# Altium PCB FIT_PM_Dual_Range_AFE.PcbDoc (part 2 of 17)
Units mm, origin at the board's own origin, x right, y up, seen from the top; angles counter-clockwise.
Board outline 259 x 114 mm, 8 copper layers (Top Layer, Mid-Layer 1, Mid-Layer 2, Layer 1, Layer 2, Mid-Layer 3, Mid-Layer 4, Bottom Layer), stack 1.616 mm thick; 963 components, 806 nets, 4757 pads, 2208 vias.
Unrouted connection lines stored in the file: 682.
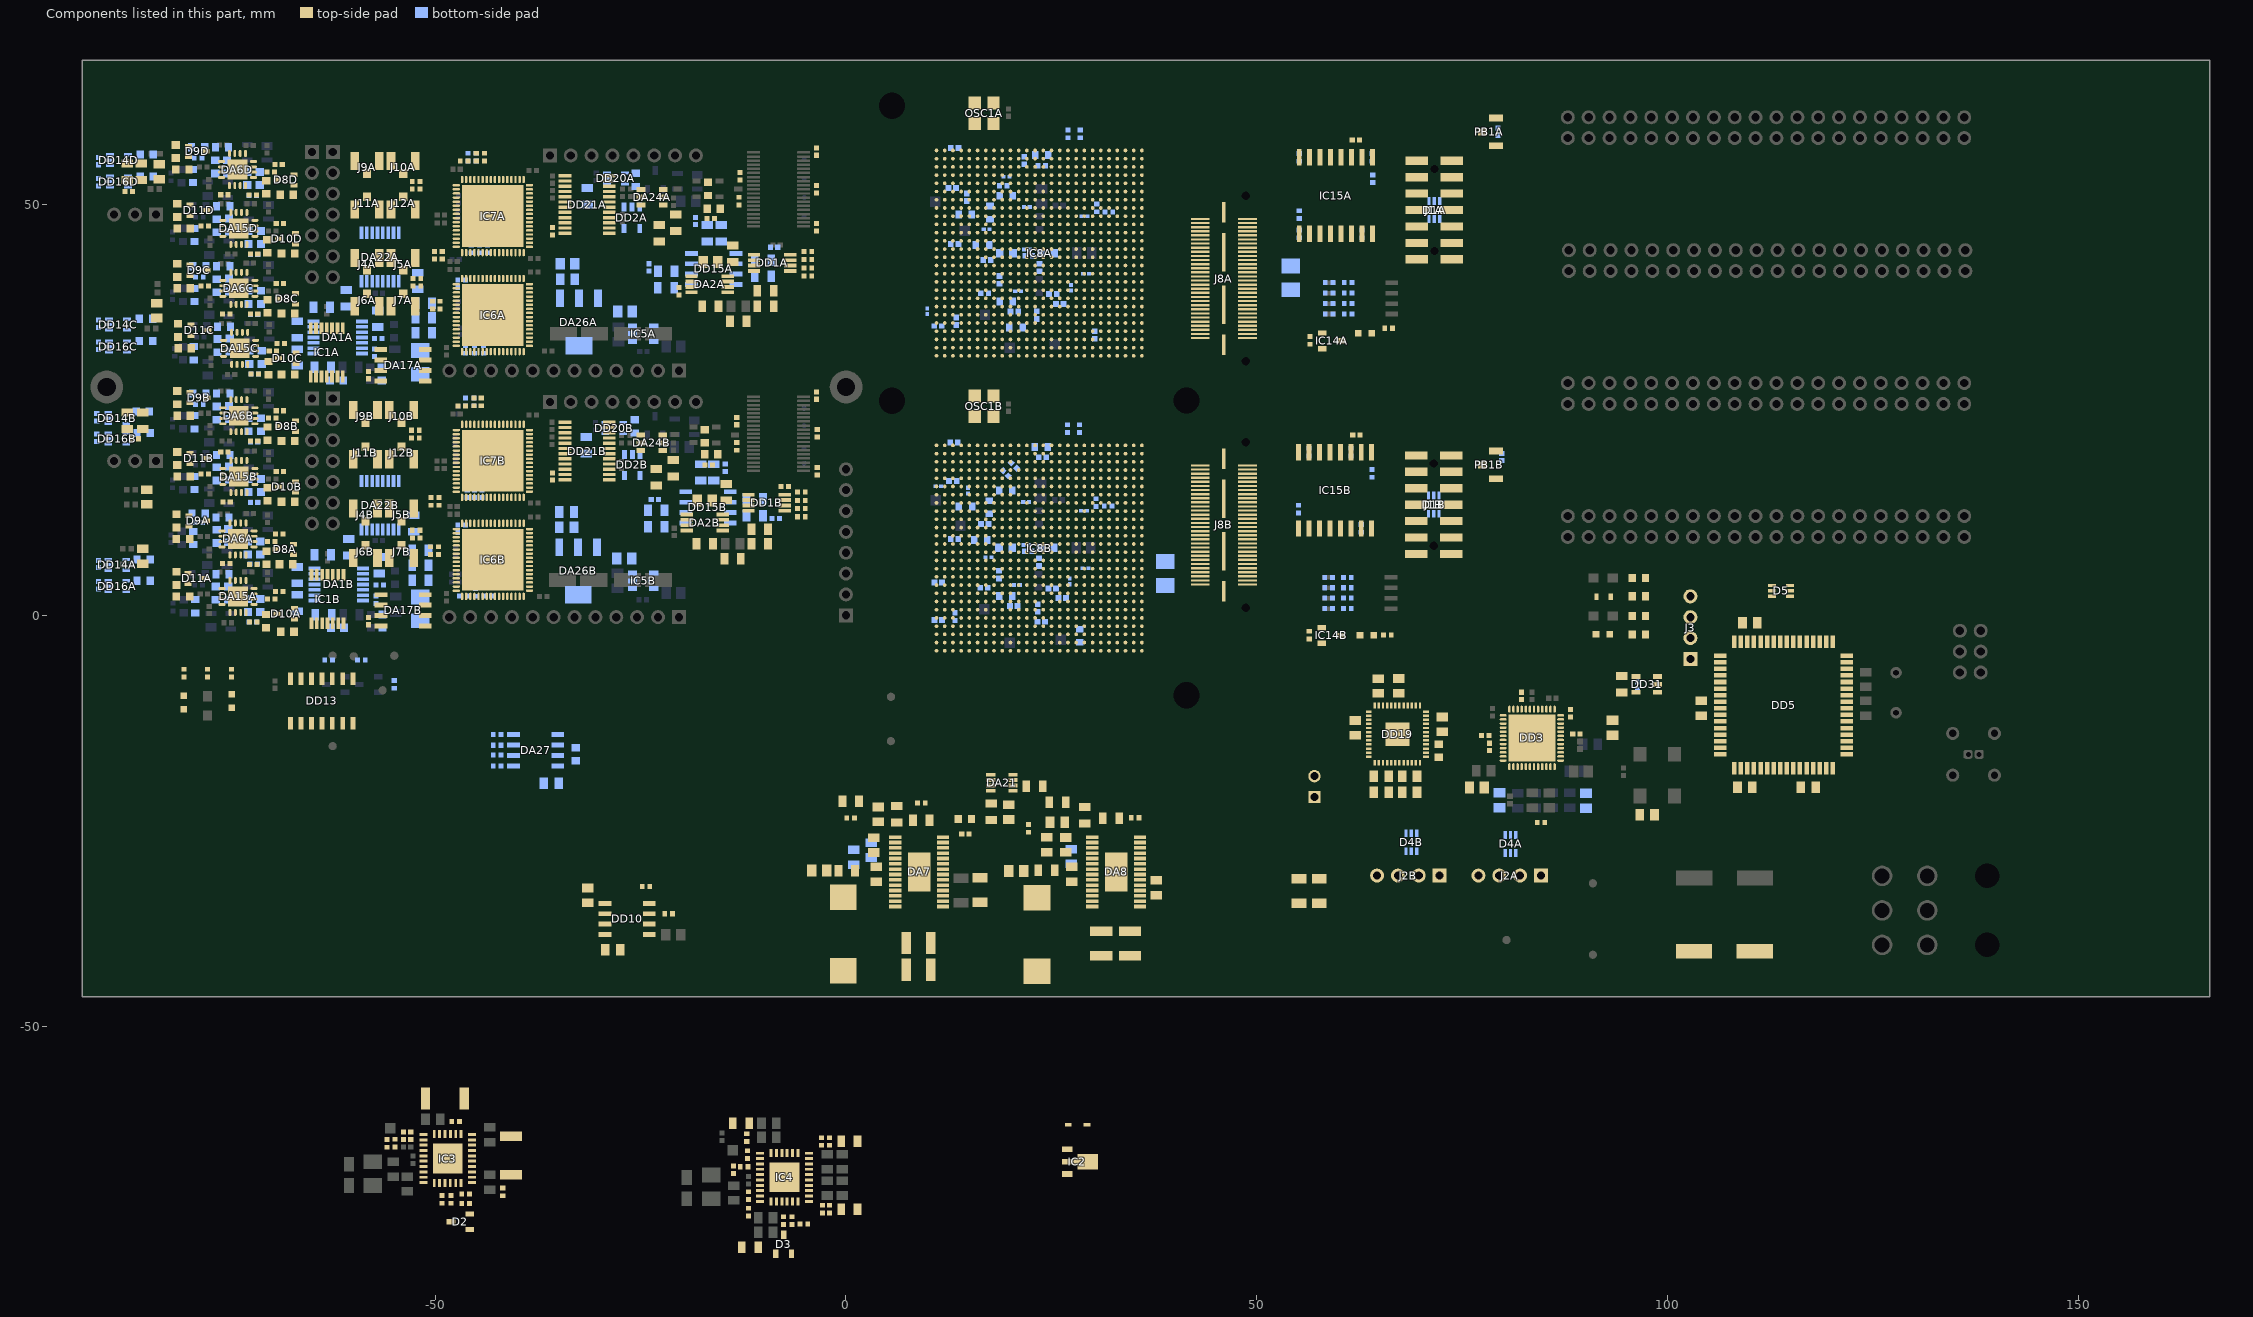
[diagram p6: the components of this part, seen from the top]

## Components (designator, comment, footprint, x,y, rotation, side; value= is the part's Value field where it differs from the comment) (continued)
C96A "220nF" CAPC1005X55N -16.45,48.3 r180 top (schematic designator C96)
C96B "220nF" CAPC1005X55N -16.7,18.3 r180 top (schematic designator C96)
C97A "220nF" CAPC1005X55N -12.9,53.45 r270 top (schematic designator C97)
C97B "220nF" CAPC1005X55N -3.5,17.55 r270 top (schematic designator C97)
C98A "470nF" CAPC0603X33N 17.12,46.997 r0 bottom (schematic designator C98)
C98B "470nF" CAPC0603X33N 11.253,15.717 r0 bottom (schematic designator C98)
C99A "220nF" CAPC1005X55N 62.075,57.856 r0 top (schematic designator C99)
C99B "220nF" CAPC1005X55N 62.133,21.967 r0 top (schematic designator C99)
C100A "220nF" CAPC1005X55N -20.3,39.45 r90 top (schematic designator C100)
C100B "220nF" CAPC1005X55N -7.45,15.7 r180 top (schematic designator C100)
C101A "220nF" CAPC1005X55N -24,42.35 r90 bottom (schematic designator C101)
C101B "220nF" CAPC1005X55N -23.25,14.1 r180 bottom (schematic designator C101)
C102A "220nF" CAPC1005X55N -75.45,6.3 r0 top (schematic designator C102)
C102B "220nF" CAPC1005X55N -75.4,13.8 r0 top (schematic designator C102)
C102C "220nF" CAPC1005X55N -75.45,36.7 r0 top (schematic designator C102)
C102D "220nF" CAPC1005X55N -75.65,51.2 r0 top (schematic designator C102)
C103A "47uF" CAPMP3528X120N -51.8,30.8 r270 bottom (schematic designator C103)
C103B "47uF" CAPMP3528X120N -51.8,0.8 r270 bottom (schematic designator C103)
C104A "220nF" CAPC1005X55N 79.369,58.836 r270 bottom (schematic designator C104)
C104B "220nF" CAPC1005X55N 79.827,19.273 r270 bottom (schematic designator C104)
C105 "220nF" CAPC1005X55N 88.915,-14.43 r180 top
C106 "220nF" CAPC1005X55N 78.319,-16.014 r270 top
C107 "220nF" CAPC1005X55N 96.349,-8.549 r270 bottom
C108 "220nF" CAPC1005X55N 88.17,-11.904 r270 top
C109 "220nF" CAPC1005X55N 82.219,-9.814 r270 top
C110A "220nF" CAPC1005X55N -3.6,47.25 r270 top (schematic designator C110)
C110B "220nF" CAPC1005X55N -3.5,22.15 r270 top (schematic designator C110)
C111A "220nF" CAPC1005X55N -3.6,56.45 r90 top (schematic designator C111)
C111B "220nF" CAPC1005X55N -3.6,26.75 r90 top (schematic designator C111)
C112A "220nF" CAPC1005X55N -3.6,51.85 r270 top (schematic designator C112)
C112B "220nF" CAPC1005X55N -13.3,23.65 r270 top (schematic designator C112)
C113A "220nF" CAPC1005X55N -8.75,44.8 r180 bottom (schematic designator C113)
C113B "220nF" CAPC1005X55N -8.55,11.8 r180 bottom (schematic designator C113)
C114 "47uF" CAPC3225X270N 8.813,-39.864 r180 top
C115 "47uF" CAPC3225X270N 8.813,-43.146 r180 top
C116A "220nF" CAPC1005X55N -35.7,46.75 r90 top (schematic designator C116)
C116B "220nF" CAPC1005X55N -35.7,16.9 r90 top (schematic designator C116)
C117A "220nF" CAPC1005X55N -18.3,48 r270 bottom (schematic designator C117)
C117B "220nF" CAPC1005X55N -14.7,17.95 r90 bottom (schematic designator C117)
C118 "22uF" CAPC3216X180N 16.314,-33.445 r90 top
C122 "220nF" CAPC2012X135N 3.102,-28.57 r270 bottom
C123 "220nF" CAPC2012X135N 3.656,-31.51 r270 top
C124 "360pF" CAPC2013X145N -3.244,-31.055 r0 top
C125A "220nF" CAPC1005X55N -91,6.25 r270 bottom (schematic designator C125)
C125B "220nF" CAPC1005X55N -91.2,24.1 r270 bottom (schematic designator C125)
C125C "220nF" CAPC1005X55N -91,32.8 r270 bottom (schematic designator C125)
C125D "220nF" CAPC1005X55N -91,52.7 r270 bottom (schematic designator C125)
C126A "220nF" CAPC1005X55N -69,9.9 r180 top (schematic designator C126)
C126B "220nF" CAPC1005X55N -68.9,24.9 r180 top (schematic designator C126)
C126C "220nF" CAPC1005X55N -68.9,40.4 r180 top (schematic designator C126)
C126D "220nF" CAPC1005X55N -69.068,54.868 r180 top (schematic designator C126)
C129A "220nF" CAPC1005X55N -69,2.9 r180 top (schematic designator C129)
C129B "220nF" CAPC1005X55N -68.9,17.5 r180 top (schematic designator C129)
C129C "220nF" CAPC1005X55N -68.8,33.1 r180 top (schematic designator C129)
C129D "220nF" CAPC1005X55N -68.9,47.7 r180 top (schematic designator C129)
C130 "4.7nF" CAPC2012X135N 3.378,-27.97 r270 top
C131A "220nF" CAPC1005X55N -58.1,29.25 r90 top (schematic designator C131)
C131B "220nF" CAPC1005X55N -58.1,-0.7 r90 top (schematic designator C131)
C132 "220nF" CAPC2012X135N 0.948,-29.454 r270 bottom
C133 "10nF" CAPC1005X55N 14.539,-26.634 r0 top
C134 "220nF" CAPC2012X135N 3.949,-24.23 r270 top
C135 "22uF" CAPC3216X180N 57.618,-33.558 r90 top
C136 "220nF" CAPC2012X135N 37.786,-33.161 r270 top
C137 "22uF" CAPC3216X180N 55.147,-33.549 r90 top
C138A "220nF" CAPC1005X55N -72.1,6.225 r180 bottom (schematic designator C138)
C138B "220nF" CAPC1005X55N -72.05,21.129 r180 bottom (schematic designator C138)
C138C "220nF" CAPC1005X55N -72.05,36.629 r180 bottom (schematic designator C138)
C138D "220nF" CAPC1005X55N -72.218,51.096 r180 bottom (schematic designator C138)
C140A "220nF" CAPC1005X55N -72.2,-0.8 r180 bottom (schematic designator C140)
C140B "220nF" CAPC1005X55N -72.05,13.729 r180 bottom (schematic designator C140)
C140C "220nF" CAPC1005X55N -71.95,29.4 r180 bottom (schematic designator C140)
C140D "220nF" CAPC1005X55N -72.05,43.929 r180 bottom (schematic designator C140)
C142 "360pF" CAPC2013X145N 20.725,-31.124 r0 top
C143 "220nF" CAPC2012X135N 27.479,-31.517 r270 top
C144A "220nF" CAPC2012X135N -33.9,40.9 r180 bottom (schematic designator C144)
C144B "220nF" CAPC2012X135N -34,10.7 r180 bottom (schematic designator C144)
C145 "47uF" CAPC3225X270N 31.082,-39.931 r90 top
C146 "47uF" CAPC3225X270N 34.58,-39.959 r90 top
C147A "10uF" CAPC1005X70N 23.573,42.346 r270 bottom (schematic designator C147)
C147B "10uF" CAPC1005X70N 23.498,6.482 r270 bottom (schematic designator C147)
C148 "4.7nF" CAPC2012X135N 24.468,-27.926 r270 top
C149 "220nF" CAPC2012X135N 27.434,-29.354 r270 bottom
C150 "100pF" CAPC2012X135N 26.754,-27.946 r270 top
C151 "220nF" CAPC2012X135N 25.731,-25.164 r0 top
C152A "10uF" CAPC1005X70N 25.186,39.139 r0 bottom (schematic designator C152)
C152B "10uF" CAPC1005X70N 25.111,3.276 r0 bottom (schematic designator C152)
C153A "33pF" CAPC1608X87N -68.15,6.225 r180 top (schematic designator C153)
C153B "33pF" CAPC1608X87N -67.9,21.229 r180 top (schematic designator C153)
C153C "33pF" CAPC1608X87N -67.9,36.729 r180 top (schematic designator C153)
C153D "33pF" CAPC1608X87N -68.068,51.196 r180 top (schematic designator C153)
C154A "33pF" CAPC1608X87N -81.5,11.5 r270 top (schematic designator C154)
C154B "33pF" CAPC1608X87N -81.4,26.5 r270 top (schematic designator C154)
C154C "33pF" CAPC1608X87N -81.4,42 r270 top (schematic designator C154)
C154D "33pF" CAPC1608X87N -81.568,56.468 r270 top (schematic designator C154)
C155A "33pF" CAPC1608X87N -68,-2 r180 top (schematic designator C155)
C155B "33pF" CAPC1608X87N -67.9,13.829 r180 top (schematic designator C155)
C155C "33pF" CAPC1608X87N -67.9,29.3 r180 top (schematic designator C155)
C155D "33pF" CAPC1608X87N -67.9,44.029 r180 top (schematic designator C155)
C156A "33pF" CAPC1608X87N -81.5,4.5 r270 top (schematic designator C156)
C156B "33pF" CAPC1608X87N -81.4,19.1 r270 top (schematic designator C156)
C156C "33pF" CAPC1608X87N -81.3,34.697 r270 top (schematic designator C156)
C156D "33pF" CAPC1608X87N -81.4,49.3 r270 top (schematic designator C156)
C157A "10uF" CAPC1005X70N 18.704,40.828 r270 bottom (schematic designator C157)
C157B "10uF" CAPC1005X70N 18.629,4.964 r270 bottom (schematic designator C157)
C158A "470nF" CAPC0603X33N 29.034,48.59 r180 bottom (schematic designator C158)
C158B "470nF" CAPC0603X33N 28.959,12.726 r180 bottom (schematic designator C158)
C159A "470nF" CAPC0603X33N 22.019,49.71 r180 bottom (schematic designator C159)
C159B "470nF" CAPC0603X33N 21.927,13.797 r180 bottom (schematic designator C159)
C160A "470nF" CAPC0603X33N 20.953,39.439 r0 bottom (schematic designator C160)
C160B "470nF" CAPC0603X33N 20.796,3.693 r0 bottom (schematic designator C160)
C161A "470nF" CAPC0603X33N 29.234,41.586 r180 bottom (schematic designator C161)
C161B "470nF" CAPC0603X33N 29.159,5.722 r180 bottom (schematic designator C161)
C162A "470nF" CAPC0603X33N 27.394,39.882 r90 bottom (schematic designator C162)
C162B "470nF" CAPC0603X33N 27.25,4.129 r90 bottom (schematic designator C162)
C163A "330uF" CAPMP3528X210N 54.119,41.086 r270 bottom (schematic designator C163)
C163B "330uF" CAPMP3528X210N 38.877,5.096 r270 bottom (schematic designator C163)
C164A "47uF" CAPC1608X100N 17.522,49.022 r270 bottom (schematic designator C164)
C164B "47uF" CAPC1608X100N 17.447,13.158 r270 bottom (schematic designator C164)
C165A "10uF" CAPC1005X70N 17.172,43.239 r0 bottom (schematic designator C165)
C165B "10uF" CAPC1005X70N 11.239,-0.589 r0 bottom (schematic designator C165)
C166A "10uF" CAPC1005X70N 13.419,35.786 r270 bottom (schematic designator C166)
C166B "10uF" CAPC1005X70N 13.212,9.282 r0 bottom (schematic designator C166)
C167A "10uF" CAPC1005X70N 14.7,50.902 r90 bottom (schematic designator C167)
C167B "10uF" CAPC1005X70N 16.899,11.139 r0 bottom (schematic designator C167)
C192 "560uF" CAPAE830X1020N 106.909,-40.877 r180 top
C193A "470nF" CAPC0603X33N 19.539,53.394 r180 bottom (schematic designator C193)
C193B "470nF" CAPC0603X33N 17.35,7.066 r0 bottom (schematic designator C193)
C194 "220nF" CAPC2012X135N -28.397,-40.724 r180 top
C195 "220nF" CAPC2012X135N -31.444,-34.095 r270 top
C196A "470nF" CAPC0603X33N 9.904,37.021 r90 bottom (schematic designator C196)
C196B "470nF" CAPC0603X33N 14.85,15.181 r90 bottom (schematic designator C196)
C197A "47uF" CAPC1608X100N 19.519,38.207 r0 bottom (schematic designator C197)
C197B "47uF" CAPC1608X100N 19.444,2.343 r0 bottom (schematic designator C197)
C198A "10uF" CAPC1005X70N 23.223,36.545 r270 bottom (schematic designator C198)
C198B "10uF" CAPC1005X70N 23.784,-0.776 r180 bottom (schematic designator C198)
C199 "220nF" CAPC2012X135N 97.51,-24.282 r180 top
C200A "4.7uF" CAPC1005X61N 23.831,54.709 r0 bottom (schematic designator C200)
C200B "4.7uF" CAPC1005X61N 23.329,0.891 r270 bottom (schematic designator C200)
C201 "220nF" CAPC2012X135N 19.807,-23.944 r90 top
C202A "18pF" CAPC2012X88N -16.5,43 r180 top (schematic designator C202)
C202B "18pF" CAPC2012X88N -17.2,14 r180 top (schematic designator C202)
C208A "47uF" CAPC1608X100N 20.692,35.022 r0 bottom (schematic designator C208)
C208B "47uF" CAPC1608X100N 28.444,-2.472 r90 bottom (schematic designator C208)
C211A "10uF" CAPC1005X70N 26.011,37.883 r0 bottom (schematic designator C211)
C211B "10uF" CAPC1005X70N 26.319,2.086 r0 bottom (schematic designator C211)
C212 "220nF" CAPC2012X135N 64.763,-8.597 r270 top
C213 "220nF" CAPC2012X135N 68.605,-19.588 r180 top
C214A "4.7uF" CAPC1005X61N 30.294,34.132 r90 bottom (schematic designator C214)
C214B "4.7uF" CAPC1005X61N 23.923,19.26 r0 bottom (schematic designator C214)
C215A "47uF" CAPC1608X100N 23.837,56.023 r0 bottom (schematic designator C215)
C215B "47uF" CAPC1608X100N 23.784,20.481 r0 bottom (schematic designator C215)
C216A "10uF" CAPC1005X70N 20.5,36.984 r0 bottom (schematic designator C216)
C216B "10uF" CAPC1005X70N 20.425,1.12 r0 bottom (schematic designator C216)
C217 "220nF" CAPC2012X135N 72.553,-13.271 r270 top
C218 "220nF" CAPC2012X135N 65.148,-21.544 r180 top
C219 "220nF" CAPC2012X135N 68.605,-21.544 r180 top
C220 "220nF" CAPC2012X135N 61.991,-13.694 r270 top
C221A "4.7uF" CAPC1005X61N 21.68,55.371 r270 bottom (schematic designator C221)
C221B "4.7uF" CAPC1005X61N 20.444,18.222 r315 bottom (schematic designator C221)
C222A "47uF" CAPC1608X100N 14.526,48.798 r180 bottom (schematic designator C222)
C222B "47uF" CAPC1608X100N 14.546,13.232 r180 bottom (schematic designator C222)
C223 "220nF" CAPC2012X135N 65.148,-19.581 r180 top
C224 "220nF" CAPC2012X135N 67.291,-8.58 r270 top
C225A "10uF" CAPC1005X70N 13.219,45.186 r0 bottom (schematic designator C225)
C225B "10uF" CAPC1005X70N 11.239,4.007 r180 bottom (schematic designator C225)
C226A "4.7uF" CAPC1005X61N 19.141,52.27 r180 bottom (schematic designator C226)
C226B "4.7uF" CAPC1005X61N 19.444,17.293 r135 bottom (schematic designator C226)
C227A "47uF" CAPC1608X100N 19.519,51.078 r180 bottom (schematic designator C227)
C227B "47uF" CAPC1608X100N 19.444,15.214 r180 bottom (schematic designator C227)
C228A "10uF" CAPC1005X70N 12.94,51.995 r180 bottom (schematic designator C228)
C228B "10uF" CAPC1005X70N 13.019,16.336 r180 bottom (schematic designator C228)
C229A "4.7uF" CAPC1005X61N 16.885,39.211 r180 bottom (schematic designator C229)
C229B "4.7uF" CAPC1005X61N 16.81,3.347 r180 bottom (schematic designator C229)
C230A "47uF" CAPC1608X100N 16.619,45.086 r0 bottom (schematic designator C230)
C230B "47uF" CAPC1608X100N 16.407,9.187 r0 bottom (schematic designator C230)
C231A "10uF" CAPC1005X70N 13.217,56.895 r0 bottom (schematic designator C231)
C231B "10uF" CAPC1005X70N 13.142,21.032 r0 bottom (schematic designator C231)
C232A "4.7uF" CAPC1005X61N 11.216,35.226 r0 bottom (schematic designator C232)
C232B "4.7uF" CAPC1005X61N 13.269,-0.164 r270 bottom (schematic designator C232)
C233A "470nF" CAPC0603X33N 22.017,44.526 r180 bottom (schematic designator C233)
C233B "470nF" CAPC0603X33N 21.942,8.562 r180 bottom (schematic designator C233)
C234A "100nF" CAPC1005X55N 22.249,43.765 r180 bottom (schematic designator C234)
C234B "100nF" CAPC1005X55N 22.174,7.802 r180 bottom (schematic designator C234)
C255 "220nF" CAPC2012X135N -35.881,-20.414 r0 bottom
C256 "220nF" CAPC2012X135N 117.119,-20.914 r0 top
C257 "220nF" CAPC2012X135N 109.419,-20.914 r0 top
C258 "220nF" CAPC2012X135N 110.019,-0.914 r180 top
C259 "220nF" CAPC2012X135N 104.119,-11.314 r270 top
C286A "10nF" CAPC1005X55N -69.95,2 r180 top (schematic designator C286)
C286B "10nF" CAPC1005X55N -78.05,17.2 r0 top (schematic designator C286)
C286C "10nF" CAPC1005X55N -69.75,32.2 r180 top (schematic designator C286)
C286D "10nF" CAPC1005X55N -78.05,47.4 r0 top (schematic designator C286)
C287A "10nF" CAPC1005X55N -72.15,-0.8 r180 top (schematic designator C287)
C287B "10nF" CAPC1005X55N -75.65,19.9 r0 top (schematic designator C287)
C287C "10nF" CAPC1005X55N -71.95,29.374 r180 top (schematic designator C287)
C287D "10nF" CAPC1005X55N -72.05,44 r180 top (schematic designator C287)
C288A "10nF" CAPC1005X55N -69.95,9 r180 top (schematic designator C288)
C288B "10nF" CAPC1005X55N -69.85,24 r180 top (schematic designator C288)
C288C "10nF" CAPC1005X55N -78.05,40.1 r0 top (schematic designator C288)
C288D "10nF" CAPC1005X55N -70.018,53.968 r180 top (schematic designator C288)
C291A "10nF" CAPC1005X55N -72.15,6.2 r180 top (schematic designator C291)
C291B "10nF" CAPC1005X55N -72.05,21.2 r180 top (schematic designator C291)
C291C "10nF" CAPC1005X55N -72.05,36.7 r180 top (schematic designator C291)
C291D "10nF" CAPC1005X55N -72.218,51.168 r180 top (schematic designator C291)
C294A "220nF" CAPC1005X55N -91,3.65 r270 bottom (schematic designator C294)
C294B "220nF" CAPC1005X55N -91.2,21.6 r270 bottom (schematic designator C294)
C294C "220nF" CAPC1005X55N -91,35.5 r270 bottom (schematic designator C294)
C294D "220nF" CAPC1005X55N -91,55.3 r270 bottom (schematic designator C294)
C304A "100nF" CAPC2012X135N -85.6,7.2 r270 top (schematic designator C304)
C304B "100nF" CAPC2012X135N -85.1,14.4 r90 top (schematic designator C304)
C304C "100nF" CAPC2012X135N -83.9,37.1 r90 top (schematic designator C304)
C304D "100nF" CAPC2012X135N -83.6,54 r90 top (schematic designator C304)
C305A "1uF" CAPC1608X87N -75.2,9.7 r90 bottom (schematic designator C305)
C305B "1uF" CAPC1608X87N -75.1,24.7 r90 bottom (schematic designator C305)
C305C "1uF" CAPC1608X87N -75.1,40.2 r90 bottom (schematic designator C305)
C305D "1uF" CAPC1608X87N -75.349,54.587 r90 bottom (schematic designator C305)
C306A "1uF" CAPC1608X87N -72.825,8.2 r270 bottom (schematic designator C306)
C306B "1uF" CAPC1608X87N -72.725,23.2 r270 bottom (schematic designator C306)
C306C "1uF" CAPC1608X87N -72.725,38.7 r270 bottom (schematic designator C306)
C306D "1uF" CAPC1608X87N -72.868,53.168 r270 bottom (schematic designator C306)
C309A "1uF" CAPC1608X87N -75.2,2.7 r90 bottom (schematic designator C309)
C309B "1uF" CAPC1608X87N -75.1,17.3 r90 bottom (schematic designator C309)
C309C "1uF" CAPC1608X87N -75,32.9 r90 bottom (schematic designator C309)
C309D "1uF" CAPC1608X87N -75.1,47.5 r90 bottom (schematic designator C309)
C310A "1uF" CAPC1608X87N -72.8,1.2 r270 bottom (schematic designator C310)
C310B "1uF" CAPC1608X87N -72.725,15.8 r270 bottom (schematic designator C310)
C310C "1uF" CAPC1608X87N -72.625,31.4 r270 bottom (schematic designator C310)
C310D "1uF" CAPC1608X87N -72.725,46 r270 bottom (schematic designator C310)
C313A "220nF" CAPC1005X55N -56.95,33.7 r180 bottom (schematic designator C313)
C313B "220nF" CAPC1005X55N -56.75,3.7 r180 bottom (schematic designator C313)
C318A "10nF" CAPC1005X55N -57.4,31.95 r90 bottom (schematic designator C318)
C318B "10nF" CAPC1005X55N -57.2,1.9 r90 bottom (schematic designator C318)
C319A "1uF" CAPC1608X87N -62,28.6 r0 bottom (schematic designator C319)
C319B "1uF" CAPC1608X87N -56.4,-0.7 r270 bottom (schematic designator C319)
C320A "1uF" CAPC1608X87N -56.5,29.4 r270 bottom (schematic designator C320)
C320B "1uF" CAPC1608X87N -61.9,-1.5 r0 bottom (schematic designator C320)
D1A "PESD3V3L5UY" SOT65P210X110-6N 71.619,49.336 r90 bottom (schematic designator D1)
D1B "PESD3V3L5UY" SOT65P210X110-6N 71.544,13.472 r90 bottom (schematic designator D1)
D2 "BZX84C3V3" SOT95P240X130-3N -46.931,-73.814 r180 top
D3 "BZX84C3V3" SOT95P240X130-3N -7.581,-76.564 r90 top
D4A "PESD3V3L5UY" SOT65P210X110-6N 80.891,-27.819 r270 bottom (schematic designator D4)
D4B "PESD3V3L5UY" SOT65P210X110-6N 68.819,-27.614 r270 bottom (schematic designator D4)
D5 "PESD3V3L5UY" SOT65P210X110-6N 113.819,2.986 r0 top
D6 "1N4148WS" SODFL2512X100N 28.2,-62 r0 top
D8A "BAT1504WH6327XTSA1" SOT65P210X110-3N -68.3,8.025 r180 top (schematic designator D8)
D8B "BAT1504WH6327XTSA1" SOT65P210X110-3N -68.05,23.029 r180 top (schematic designator D8)
D8C "BAT1504WH6327XTSA1" SOT65P210X110-3N -68.05,38.529 r180 top (schematic designator D8)
D8D "BAT1504WH6327XTSA1" SOT65P210X110-3N -68.218,52.996 r180 top (schematic designator D8)
D9A "BAT1504WH6327XTSA1" SOT65P210X110-3N -78.9,11.5 r0 top (schematic designator D9)
D9B "BAT1504WH6327XTSA1" SOT65P210X110-3N -78.8,26.5 r0 top (schematic designator D9)
D9C "BAT1504WH6327XTSA1" SOT65P210X110-3N -78.8,42 r0 top (schematic designator D9)
D9D "BAT1504WH6327XTSA1" SOT65P210X110-3N -78.968,56.468 r0 top (schematic designator D9)
D10A "BAT1504WH6327XTSA1" SOT65P210X110-3N -68.2,0.2 r180 top (schematic designator D10)
D10B "BAT1504WH6327XTSA1" SOT65P210X110-3N -68.05,15.629 r180 top (schematic designator D10)
D10C "BAT1504WH6327XTSA1" SOT65P210X110-3N -68,31.3 r180 top (schematic designator D10)
D10D "BAT1504WH6327XTSA1" SOT65P210X110-3N -68.05,45.829 r180 top (schematic designator D10)
D11A "BAT1504WH6327XTSA1" SOT65P210X110-3N -79.05,4.5 r0 top (schematic designator D11)
D11B "BAT1504WH6327XTSA1" SOT65P210X110-3N -78.8,19.1 r0 top (schematic designator D11)
D11C "BAT1504WH6327XTSA1" SOT65P210X110-3N -78.7,34.7 r0 top (schematic designator D11)
D11D "BAT1504WH6327XTSA1" SOT65P210X110-3N -78.8,49.3 r0 top (schematic designator D11)
DA1A "ADA4522-4ARUZ" SOP65P640X120-14N -61.869,33.824 r180 bottom (schematic designator DA1)
DA1B "ADA4522-4ARUZ" SOP65P640X120-14N -61.763,3.756 r180 bottom (schematic designator DA1)
DA2A "ADCMP553BRM" SOP65P490X110-8N -16.6,40.3 r180 top (schematic designator DA2)
DA2B "ADCMP553BRM" SOP65P490X110-8N -17.2,11.3 r180 top (schematic designator DA2)
DA6A "ADA4817-2ACPZ" QFN65P400X400X80-17N-S240 -74,9.3 r270 top (schematic designator DA6)
DA6B "ADA4817-2ACPZ" QFN65P400X400X80-17N-S240 -73.9,24.3 r270 top (schematic designator DA6)
DA6C "ADA4817-2ACPZ" QFN65P400X400X80-17N-S240 -73.9,39.8 r270 top (schematic designator DA6)
DA6D "ADA4817-2ACPZ" QFN65P400X400X80-17N-S240 -74.068,54.268 r270 top (schematic designator DA6)
DA7 "LTC3649EFE" SOP65P640X120-29N-R274X475 8.904,-31.224 r180 top
DA8 "LTC7149EFE" SOP65P640X120-29N-R274X475 32.894,-31.224 r180 top
DA15A "ADA4817-2ACPZ" QFN65P400X400X80-17N-S240 -74,2.3 r270 top (schematic designator DA15)
DA15B "ADA4817-2ACPZ" QFN65P400X400X80-17N-S240 -73.9,16.9 r270 top (schematic designator DA15)
DA15C "ADA4817-2ACPZ" QFN65P400X400X80-17N-S240 -73.8,32.5 r270 top (schematic designator DA15)
DA15D "ADA4817-2ACPZ" QFN65P400X400X80-17N-S240 -73.9,47.1 r270 top (schematic designator DA15)
DA17A "REF191ES" SOIC127P600X175-8N -53.915,30.436 r0 top (schematic designator DA17)
DA17B "REF191ES" SOIC127P600X175-8N -53.9,0.6 r0 top (schematic designator DA17)
DA21 "LTC2906ITS8" SOT65P280X100-8N 18.971,-20.376 r0 top
DA22A "DAC8554IPW" SOP65P640X110-16N -56.7,43.6 r90 bottom (schematic designator DA22)
DA22B "DAC8554IPW" SOP65P640X110-16N -56.7,13.4 r90 bottom (schematic designator DA22)
DA24A "TLV3501AIDBV" SOT95P280X145-6N -23.6,50.9 r180 top (schematic designator DA24)
DA24B "TLV3501AIDBV" SOT95P280X145-6N -23.65,21 r180 top (schematic designator DA24)
DA26A "LM3940IMP-3.3/NOPB" SOT230P700X180-4N -32.5,35.7 r270 bottom (schematic designator DA26)
DA26B "LM3940IMP-3.3/NOPB" SOT230P700X180-4N -32.6,5.4 r270 bottom (schematic designator DA26)
DA27 "ADT7311WTR" SOIC127P600X175-8N -37.769,-16.414 r0 bottom
DD1A "SN65EPT23DGK" SOP65P490X110-8N -9,42.9 r0 top (schematic designator DD1)
DD1B "SN65EPT23DGK" SOP65P490X110-8N -9.658,13.706 r0 top (schematic designator DD1)
DD2A "DS90LT012ATMF" SOT95P280X145-5N -26.05,48.4 r270 bottom (schematic designator DD2)
DD2B "DS90LT012ATMF" SOT95P280X145-5N -26,18.3 r270 bottom (schematic designator DD2)
DD3 "CDCE62005RGZT" QFN50P700X700X100-49N-S570 83.499,-14.921 r180 top
DD5 "ATXMEGA128A3U-AU" QFP80P1600X1600X120-64N 114.119,-10.914 r270 top
DD10 "LMC555CM/NOPB" SOIC127P600X175-8N -26.64,-36.959 r180 top
DD13 "SN74HCT08D" SOIC127P600X175-14N -63.797,-10.424 r90 top
DD14A "SN74AHCT1G08DCK" SOT65P210X110-5N -88.7,6.15 r0 bottom (schematic designator DD14)
DD14B "SN74AHCT1G08DCK" SOT65P210X110-5N -88.7,24 r0 bottom (schematic designator DD14)
DD14C "SN74AHCT1G08DCK" SOT65P210X110-5N -88.6,35.4 r0 bottom (schematic designator DD14)
DD14D "SN74AHCT1G08DCK" SOT65P210X110-5N -88.5,55.4 r0 bottom (schematic designator DD14)
DD15A "MC10EP52D" SOIC127P600X175-8N -16.1,42.165 r0 bottom (schematic designator DD15)
DD15B "MC10EP52D" SOIC127P600X175-8N -16.8,13.135 r0 bottom (schematic designator DD15)
DD16A "SN74AHCT1G08DCK" SOT65P210X110-5N -88.7,3.55 r0 bottom (schematic designator DD16)
DD16B "SN74AHCT1G08DCK" SOT65P210X110-5N -88.7,21.5 r0 bottom (schematic designator DD16)
DD16C "SN74AHCT1G08DCK" SOT65P210X110-5N -88.6,32.7 r0 bottom (schematic designator DD16)
DD16D "SN74AHCT1G08DCK" SOT65P210X110-5N -88.5,52.8 r0 bottom (schematic designator DD16)
DD19 "ADCLK854BCP" QFN50P700X700X80-49N-S290 67.119,-14.464 r180 top
DD20A "SN74AHCT1G08DCK" SOT65P210X110-5N -28,53.2 r0 bottom (schematic designator DD20)
DD20B "SN74AHCT1G08DCK" SOT65P210X110-5N -28.2,22.8 r0 bottom (schematic designator DD20)
DD21A "CDCF5801ADBQ" SOP63P600X175-24N -31.5,50 r180 top (schematic designator DD21)
DD21B "CDCF5801ADBQ" SOP63P600X175-24N -31.5,20 r180 top (schematic designator DD21)
DD31 "SN74LVC1G17DBV" SOT95P280X145-5N 97.469,-8.414 r180 top
HS1A "Heat Sink 2 Pads" HSINK_WAKEFIELD_960-29-18-D-AB-0 23.519,44.086 r0 top locked (schematic designator HS1)
HS1B "Heat Sink 2 Pads" HSINK_WAKEFIELD_960-29-18-D-AB-0 23.519,8.186 r0 top locked (schematic designator HS1)
IC1A "ADA4522-4ARUZ" SOP65P640X120-14N -63.2,32 r270 top (schematic designator IC1)
IC1B "ADA4522-4ARUZ" SOP65P640X120-14N -63.104,1.987 r270 top (schematic designator IC1)
IC2 "L78L05ACUTR" SOT89 28.826,-66.5 r0 top
IC3 "MPM54304GMN-0004" MPS_MPM54304GMN -48.478,-66.114 r90 top
IC4 "MPM54304GMN-0001" MPS_MPM54304GMN -7.481,-68.402 r90 top
IC5A "AP2112K-1.8TRG1" SOT95P285X140-5N -24.7,34.3 r0 bottom (schematic designator IC5)
IC5B "AP2112K-1.8TRG1" SOT95P285X140-5N -24.7,4.2 r0 bottom (schematic designator IC5)
IC6A "ADS4249IRGC" QFN50P900X900X100-65N-S750 -42.977,36.556 r270 top locked (schematic designator IC6)
IC6B "ADS4249IRGC" QFN50P900X900X100-65N-S750 -42.977,6.756 r270 top locked (schematic designator IC6)
IC7A "ADS4249IRGC" QFN50P900X900X100-65N-S750 -42.977,48.606 r270 top locked (schematic designator IC7)
IC7B "ADS4249IRGC" QFN50P900X900X100-65N-S750 -42.977,18.806 r270 top locked (schematic designator IC7)
IC8A "XCAU10P-2FFVB676I" BGA676C100P26X26_2700X2700X350#1 23.519,44.086 r180 top locked (schematic designator IC8)
IC8B "XCAU10P-2FFVB676I" BGA676C100P26X26_2700X2700X350#2 23.519,8.186 r180 top locked (schematic designator IC8)
IC14A "BSS138LT1G" SOT95P240X110-3N 59.118,33.412 r0 top (schematic designator IC14)
IC14B "BSS138LT1G" SOT95P240X110-3N 59.043,-2.452 r0 top (schematic designator IC14)
IC15A "MT25QU256ABA8ESF-0SIT" SOIC127P1030X265-16N 59.619,51.086 r270 top (schematic designator IC15)
IC15B "MT25QU256ABA8ESF-0SIT" SOIC127P1030X265-16N 59.544,15.222 r270 top (schematic designator IC15)
J1A "" MOLEX_87832-1420 71.619,49.336 r90 top (schematic designator J1)
J1B "" MOLEX_87832-1420 71.544,13.472 r90 top (schematic designator J1)
J2A "Header 4" SAMTEC_TSW-104-07-L-S-LL 84.598,-31.667 r180 top (schematic designator J2)
J2B "Header 4" SAMTEC_TSW-104-07-L-S-LL 72.258,-31.667 r180 top (schematic designator J2)
J3 "Header 4" SAMTEC_TSW-104-07-L-S-LL 102.779,-5.305 r90 top
J4A "U.FL" HIROSE_U.FL-R-SMT-1 -58.3,43.514 r0 top (schematic designator J4)
J4B "U.FL" HIROSE_U.FL-R-SMT-1 -58.5,13 r0 top (schematic designator J4)
J5A "U.FL" HIROSE_U.FL-R-SMT-1 -53.9,43.514 r0 top (schematic designator J5)
J5B "U.FL" HIROSE_U.FL-R-SMT-1 -54.1,13 r0 top (schematic designator J5)
J6A "U.FL" HIROSE_U.FL-R-SMT-1 -58.3,37.621 r180 top (schematic designator J6)
J6B "U.FL" HIROSE_U.FL-R-SMT-1 -58.5,7 r180 top (schematic designator J6)
J7A "U.FL" HIROSE_U.FL-R-SMT-1 -53.9,37.621 r180 top (schematic designator J7)
J7B "U.FL" HIROSE_U.FL-R-SMT-1 -54.1,7 r180 top (schematic designator J7)
J8A "" SAMTEC_QSH-030-01-L-D-A 46,41 r270 top (schematic designator J8)
J8B "" SAMTEC_QSH-030-01-L-D-A 46,11 r270 top (schematic designator J8)
J9A "U.FL" HIROSE_U.FL-R-SMT-1 -58.3,55.3 r0 top (schematic designator J9)
J9B "U.FL" HIROSE_U.FL-R-SMT-1 -58.5,25 r0 top (schematic designator J9)
J10A "U.FL" HIROSE_U.FL-R-SMT-1 -53.9,55.3 r0 top (schematic designator J10)
J10B "U.FL" HIROSE_U.FL-R-SMT-1 -54.1,25 r0 top (schematic designator J10)
J11A "U.FL" HIROSE_U.FL-R-SMT-1 -58.3,49.407 r180 top (schematic designator J11)
J11B "U.FL" HIROSE_U.FL-R-SMT-1 -58.5,19 r180 top (schematic designator J11)
J12A "U.FL" HIROSE_U.FL-R-SMT-1 -53.9,49.407 r180 top (schematic designator J12)
J12B "U.FL" HIROSE_U.FL-R-SMT-1 -54.1,19 r180 top (schematic designator J12)
JP1 "1798942 (goldpin 2x 2.54)" jump 57.019,-22.114 r180 top
L1A "220R@100MHz" INDC2012X105N#1 -33.9,42.8 r0 bottom (schematic designator L1)
L1B "220R@100MHz" INDC2012X105N#2 -34,12.6 r0 bottom (schematic designator L1)
L2A "220R@100MHz" INDC2012X105N#1 -26.9,37 r0 bottom (schematic designator L2)
L2B "220R@100MHz" INDC2012X105N#1 -27,6.9 r0 bottom (schematic designator L2)
L3 "220R@100MHz" INDC2012X105N#1 76.798,-20.951 r0 top
L4 "220R@100MHz" INDC2012X105N#1 90.066,-22.567 r90 bottom
L5 "220R@100MHz" INDC2012X105N#1 93.313,-13.669 r270 top
L6 "220R@100MHz" INDC2012X105N#1 79.546,-22.493 r90 bottom
L7A "120R@100MHz" INDC1608X95N 19.519,44.086 r180 bottom (schematic designator L7)
L7B "120R@100MHz" INDC1608X95N 19.444,8.222 r180 bottom (schematic designator L7)
L8A "120R@100MHz" INDC1608X95N 24.556,44.079 r0 bottom (schematic designator L8)
L8B "120R@100MHz" INDC1608X95N 24.481,8.216 r0 bottom (schematic designator L8)
L9 "10uH" IND_VISHAY_IHPL4040DZ-01 -0.345,-38.799 r270 top
L10 "10uH" IND_VISHAY_IHPL4040DZ-01 23.263,-38.834 r270 top
L25A "220R@100MHz" INDC1608X95N -76.598,9.619 r270 bottom (schematic designator L25)
L25B "220R@100MHz" INDC1608X95N -76.6,24.619 r270 bottom (schematic designator L25)
L25C "220R@100MHz" INDC1608X95N -76.6,40.119 r270 bottom (schematic designator L25)
L25D "220R@100MHz" INDC1608X95N -76.768,54.587 r270 bottom (schematic designator L25)
L26A "220R@100MHz" INDC1608X95N -71.306,8.2 r90 bottom (schematic designator L26)
L26B "220R@100MHz" INDC1608X95N -71.2,23.2 r90 bottom (schematic designator L26)
L26C "220R@100MHz" INDC1608X95N -71.2,38.7 r90 bottom (schematic designator L26)
L26D "220R@100MHz" INDC1608X95N -71.368,53.168 r90 bottom (schematic designator L26)
L29A "220R@100MHz" INDC1608X95N -76.7,2.7 r270 bottom (schematic designator L29)
L29B "220R@100MHz" INDC1608X95N -76.6,17.219 r270 bottom (schematic designator L29)
L29C "220R@100MHz" INDC1608X95N -76.5,32.819 r270 bottom (schematic designator L29)
L29D "220R@100MHz" INDC1608X95N -76.6,47.419 r270 bottom (schematic designator L29)
L30A "220R@100MHz" INDC1608X95N -71.3,1.2 r90 bottom (schematic designator L30)
L30B "220R@100MHz" INDC1608X95N -71.2,15.8 r90 bottom (schematic designator L30)
L30C "220R@100MHz" INDC1608X95N -71.1,31.4 r90 bottom (schematic designator L30)
L30D "220R@100MHz" INDC1608X95N -71.2,46 r90 bottom (schematic designator L30)
LD1 "Green" LED_KINGBRIGHT_KPH-1608CGCK -74.781,-10.414 r90 top
LD2 "Blue" "LED_OSRAM_LB Q39G" 92.219,2.286 r180 top
LD3 "Green" LED_KINGBRIGHT_KPH-1608CGCK 92.119,-2.314 r180 top
LD4 "Green" LED_KINGBRIGHT_KPH-1608CGCK -80.581,-10.614 r270 top
LED1A "Red" LED_KINGBRIGHT_KPH-1608SURCK 63.179,34.346 r0 top (schematic designator LED1)
LED1B "Red" LED_KINGBRIGHT_KPH-1608SURCK 63.393,-2.402 r0 top (schematic designator LED1)
OSC1A "25MHz" OSC_ECS_ECS-3518 16.815,61.11 r0 top (schematic designator OSC1)
OSC1B "25MHz" OSC_ECS_ECS-3518 16.815,25.46 r0 top (schematic designator OSC1)
PB1A "Push Button" PB_OMRON_B3U-1100P 79.119,58.836 r270 top (schematic designator PB1)
PB1B "Push Button" PB_OMRON_B3U-1100P 79.119,18.304 r270 top (schematic designator PB1)
R1A "510" RESC2012X60N -9.8,37.6 r0 top (schematic designator R1)
R1B "510" RESC2012X60N -10.5,8.7 r0 top (schematic designator R1)
R2A "510" RESC2012X60N -16.5,37.6 r0 top (schematic designator R2)
R2B "510" RESC2012X60N -17.2,8.7 r0 top (schematic designator R2)
R3A "510" RESC2012X60N -9.8,39.5 r0 top (schematic designator R3)
R3B "510" RESC2012X60N -10.5,10.5 r0 top (schematic designator R3)
R4A "5R1" RESC1005X40N -49.4,37.77 r270 top (schematic designator R4)
R4B "5R1" RESC1005X40N -49.6,7.87 r270 top (schematic designator R4)
R5A "5R1" RESC1005X40N -50.3,37.77 r270 top (schematic designator R5)
R5B "5R1" RESC1005X40N -50.562,7.874 r270 top (schematic designator R5)
R6A "5R1" RESC1005X40N -49.143,43.83 r270 top (schematic designator R6)
R6B "5R1" RESC1005X40N -49.543,13.87 r270 top (schematic designator R6)
R7A "5R1" RESC1005X40N -50.1,43.83 r270 top (schematic designator R7)
R7B "5R1" RESC1005X40N -50.5,13.87 r270 top (schematic designator R7)
R8A "0" RESC1005X40N -46.3,32.37 r270 bottom (schematic designator R8)
R8B "0" RESC1005X40N -46.57,2.33 r0 bottom (schematic designator R8)
R9A "510" RESC2012X60N -13.1,35.8 r180 top (schematic designator R9)
R9B "510" RESC2012X60N -13.8,6.9 r180 top (schematic designator R9)
R10A "51" RESC2012X60N -10.1,41.3 r0 bottom (schematic designator R10)
R10B "51" RESC2012X60N -11.1,12.1 r0 bottom (schematic designator R10)
R11A "1k3" RESC2012X60N -85.6,23.7 r90 top (schematic designator R11)
R11B "1k3" RESC2012X60N -87.5,23.7 r90 top (schematic designator R11)
R11C "1k3" RESC2012X60N -87.5,54 r90 top (schematic designator R11)
R11D "1k3" RESC2012X60N -85.8,54 r90 top (schematic designator R11)
R12A "33" RESC1608X55N -80.7,9.3 r180 top (schematic designator R12)
R12B "33" RESC1608X55N -80.6,24.3 r180 top (schematic designator R12)
R12C "33" RESC1608X55N -80.596,39.804 r180 top (schematic designator R12)
R12D "33" RESC1608X55N -80.768,54.268 r180 top (schematic designator R12)
R13A "220" RESC1608X64N -75.9,11.9 r0 bottom (schematic designator R13)
R13B "220" RESC1608X64N -75.8,27 r0 bottom (schematic designator R13)
R13C "220" RESC1608X64N -75.8,42.5 r0 bottom (schematic designator R13)
R13D "220" RESC1608X64N -75.968,56.968 r0 bottom (schematic designator R13)
R14A "0" RESC1005X40N -44.1,32.37 r270 bottom (schematic designator R14)
R14B "0" RESC1005X40N -43.63,2.33 r180 bottom (schematic designator R14)
R15A "0" RESC1005X40N -45.2,32.37 r270 bottom (schematic designator R15)
R15B "0" RESC1005X40N -45.1,2.8 r270 bottom (schematic designator R15)
R16 "1k" RESC1005X40N -46.3,-71.6 r180 top
R17A "100" RESC1608X55N -85.5,6.8 r0 bottom (schematic designator R17)
R17B "100" RESC1608X55N -85.6,24.8 r0 bottom (schematic designator R17)
R17C "100" RESC1608X55N -85.2,36.1 r0 bottom (schematic designator R17)
R17D "100" RESC1608X55N -85.1,56.1 r0 bottom (schematic designator R17)
R18 "68k" RESC1005X40N -49.181,-71.084 r270 top
R19A "220" RESC1608X64N -79.45,9.425 r270 bottom (schematic designator R19)
R19B "220" RESC1608X64N -79.3,23.5 r270 bottom (schematic designator R19)
R19C "220" RESC1608X64N -79.3,39 r270 bottom (schematic designator R19)
R19D "220" RESC1608X64N -79.468,53.468 r270 bottom (schematic designator R19)
R20A "1k" RESC1005X40N -44,55.77 r90 top (schematic designator R20)
R20B "1k" RESC1005X40N -44.4,25.97 r90 top (schematic designator R20)
R21A "Undefined" RESC1005X40N -45,55.77 r90 top (schematic designator R21)
R21B "Undefined" RESC1005X40N -45.3,25.97 r90 top (schematic designator R21)
R22A "1k" RESC1005X40N -46.777,40.806 r180 bottom (schematic designator R22)
R22B "1k" RESC1005X40N -46.777,11.006 r180 bottom (schematic designator R22)
R23A "1k" RESC1005X40N -46.47,55.3 r180 top (schematic designator R23)
R23B "1k" RESC1005X40N -46.77,25.5 r180 top (schematic designator R23)
R24A "1k" RESC1005X40N -45,55.77 r270 bottom (schematic designator R24)
R24B "1k" RESC1005X40N -45.3,25.97 r270 bottom (schematic designator R24)
R25A "33" RESC1608X55N -70.6,-0.7 r270 top (schematic designator R25)
R25B "33" RESC1608X55N -70.4,14.729 r270 top (schematic designator R25)
R25C "33" RESC1608X55N -70.3,30.1 r270 top (schematic designator R25)
R25D "33" RESC1608X55N -70.45,44.929 r270 top (schematic designator R25)
R26A "Undefined" RESC1005X40N -46.777,39.906 r0 bottom (schematic designator R26)
R26B "Undefined" RESC1005X40N -46.777,10.106 r0 bottom (schematic designator R26)
R27 "33" RESC1005X40N 84.598,-25.233 r180 top
R28 "1k" RESC1005X40N 77.811,-14.609 r0 top
R29A "33" RESC1608X55N -80.7,2.3 r180 top (schematic designator R29)
R29B "33" RESC1608X55N -80.6,16.9 r180 top (schematic designator R29)
R29C "33" RESC1608X55N -80.5,32.5 r180 top (schematic designator R29)
R29D "33" RESC1608X55N -80.6,47.1 r180 top (schematic designator R29)
R30A "Undefined" RESC1005X40N -46,55.77 r270 bottom (schematic designator R30)
R30B "Undefined" RESC1005X40N -46.3,25.97 r270 bottom (schematic designator R30)
R31A "100" RESC2012X60N -66.8,31.4 r270 bottom (schematic designator R31)
R31B "100" RESC2012X60N -66.8,1.5 r270 bottom (schematic designator R31)
R32A "0" RESC1005X40N -45.616,44.61 r270 bottom (schematic designator R32)
R32B "0" RESC1005X40N -46.1,14.8 r270 bottom (schematic designator R32)
R33A "220" RESC1608X64N -75.9,5 r0 bottom (schematic designator R33)
R33B "220" RESC1608X64N -75.8,19.525 r0 bottom (schematic designator R33)
R33C "220" RESC1608X64N -75.7,35.125 r0 bottom (schematic designator R33)
R33D "220" RESC1608X64N -75.8,49.8 r0 bottom (schematic designator R33)
R34A "10k" RESC2012X60N -63.7,30.2 r180 bottom (schematic designator R34)
R34B "10k" RESC2012X60N -63.6,0.1 r180 bottom (schematic designator R34)
R35A "100" RESC1608X55N -85.5,4.2 r0 bottom (schematic designator R35)
R35B "100" RESC1608X55N -85.5,22.2 r0 bottom (schematic designator R35)
R35C "100" RESC1608X55N -85.2,33.4 r0 bottom (schematic designator R35)
R35D "100" RESC1608X55N -85.1,53.4 r0 bottom (schematic designator R35)
R36 "68k" RESC1005X40N -48.081,-71.084 r270 top
R37 "0" RESC5025X65N -40.781,-65.764 r90 top
R38A "220" RESC1608X64N -79.2,1.1 r270 bottom (schematic designator R38)
R38B "220" RESC1608X64N -79.3,16.1 r270 bottom (schematic designator R38)
R38C "220" RESC1608X64N -79.4,31.9 r270 bottom (schematic designator R38)
R38D "220" RESC1608X64N -79.3,46.3 r270 bottom (schematic designator R38)
R39A "300" RESC2012X60N -51.4,34.4 r0 bottom (schematic designator R39)
R39B "300" RESC2012X60N -51.8,4.3 r0 bottom (schematic designator R39)
R40 "1k" RESC1005X40N -41.781,-70.184 r90 top
R41A "100" RESC2012X60N -57,36.1 r90 bottom (schematic designator R41)
R41B "100" RESC2012X60N -56.8,6.1 r90 bottom (schematic designator R41)
R42A "300" RESC2012X60N -51.4,36.2 r0 bottom (schematic designator R42)
R42B "300" RESC2012X60N -51.8,6.1 r0 bottom (schematic designator R42)
R43 "2k4" RESC1005X40N -46.311,-70.414 r180 top
R44A "300" RESC2012X60N -51.4,38 r180 bottom (schematic designator R44)
R44B "300" RESC2012X60N -51.8,7.9 r180 bottom (schematic designator R44)
R45 "68k" RESC1005X40N -47.511,-61.614 r180 top
R45xA "5k1" RESC2012X60N -60.8,38.6 r270 bottom (schematic designator R45x)
R45xB "5k1" RESC2012X60N -60.5,8.3 r270 bottom (schematic designator R45x)
R46A "300" RESC2012X60N -52.1,40.7 r270 bottom (schematic designator R46)
R46B "300" RESC2012X60N -52.624,11.179 r270 bottom (schematic designator R46)
R47 "15k" RESC1005X40N -55.881,-64.284 r270 top
R48 "1M" RESC1005X40N -54.881,-64.244 r270 top
R49A "100" RESC1608X55N -16.8,51.9 r270 top (schematic designator R49)
R49B "100" RESC1608X55N -17.2,21.8 r270 top (schematic designator R49)
R50A "100" RESC1608X55N -16.1,49.5 r180 top (schematic designator R50)
R50B "100" RESC1608X55N -16.4,19.6 r180 top (schematic designator R50)
R51A "1k" RESC1005X40N -13,50.43 r90 top (schematic designator R51)
R51B "1k" RESC1005X40N -13.3,20.57 r90 top (schematic designator R51)
R52 "0" RESC5025X65N -48.831,-58.814 r0 top
R53A "0" RESC1005X40N -44.616,44.61 r270 bottom (schematic designator R53)
R53B "0" RESC1005X40N -45.2,14.8 r270 bottom (schematic designator R53)
R54A "100" RESC1608X55N -25.6,53 r270 bottom (schematic designator R54)
R54B "100" RESC1608X55N -25.7,23 r270 bottom (schematic designator R54)
R55A "0" RESC1005X40N -43.616,44.61 r270 bottom (schematic designator R55)
R55B "0" RESC1005X40N -44.3,14.8 r270 bottom (schematic designator R55)
R56 "15k" RESC1005X40N -52.981,-63.344 r90 top
R57A "1k3" RESC2012X60N -22.7,46.5 r270 top (schematic designator R57)
R57B "1k3" RESC2012X60N -23.1,16.8 r270 top (schematic designator R57)
R58 "15k" RESC1005X40N -53.881,-63.344 r270 top
R59 "5R1" RESC2012X60N 0.104,-31.099 r0 top
R60 "8k2" RESC2012X60N 9.169,-24.914 r180 top
R61 "10k" RESC1608X55N 14.475,-24.777 r180 top
R62 "110k" RESC2012X60N 0.57,-22.623 r0 top
R63 "1k" RESC1005X40N 0.561,-24.667 r0 top
R64 "1k" RESC1005X40N 9.169,-22.849 r0 top
R65 "330k" RESC2012X60N 6.161,-24.22 r270 top
R66 "1k" RESC1005X40N -21.585,-36.32 r180 top
R67 "5R1" RESC2012X60N 24.41,-31.01 r0 top
R68 "110k" RESC2012X60N 25.744,-22.774 r0 top
R69 "1k" RESC1005X40N 22.22,-25.927 r270 top
R70 "1k" RESC1005X40N 35.205,-24.639 r180 top
R71 "8k2" RESC2012X60N 32.258,-24.682 r0 top
R72 "330k" RESC2012X60N 29.086,-24.337 r270 top
R73 "33" RESC1005X40N -24.341,-32.995 r180 top
R74A "330" RESC1005X40N -4.63,43.3 r0 top (schematic designator R74)
R74B "330" RESC1005X40N -5.43,14 r0 top (schematic designator R74)
R75A "330" RESC1005X40N -4.63,44.3 r0 top (schematic designator R75)
R75B "330" RESC1005X40N -5.43,15 r0 top (schematic designator R75)
R76A "330" RESC1005X40N -4.63,42.3 r0 top (schematic designator R76)
R76B "330" RESC1005X40N -5.43,13 r0 top (schematic designator R76)
R77A "330" RESC1005X40N -4.63,41.3 r0 top (schematic designator R77)
R77B "330" RESC1005X40N -5.43,12 r0 top (schematic designator R77)
R78 "1k" RESC1005X40N -5.13,-74.1 r180 top
R79 "68k" RESC1005X40N -7.581,-73.684 r270 top
R80 "1k" RESC1005X40N -62.981,-5.414 r0 bottom
R81A "18k" RESC2012X60N -20.7,47.8 r270 top (schematic designator R81)
R81B "18k" RESC2012X60N -21,17.9 r270 top (schematic designator R81)
R82 "68k" RESC1005X40N -6.581,-73.684 r270 top
R83 "1k" RESC1005X40N -58.981,-5.414 r0 bottom
R84 "0" RESC2012X60N 0.419,-64.014 r0 top
R85 "15k" RESC1005X40N -1.981,-64.044 r270 top
R86 "7k5" RESC1005X40N -2.981,-64.044 r90 top
R87 "0" RESC2012X60N 0.419,-72.314 r0 top
R88 "68k" RESC1005X40N -1.981,-72.284 r90 top
R89 "15k" RESC1005X40N -13.681,-67.484 r270 top
R90 "15k" RESC1005X40N -2.881,-72.284 r270 top
R91 "1M" RESC1005X40N -12.411,-67.114 r180 top
R92 "0" RESC2012X60N -11.681,-76.914 r180 top
R93 "80k6" RESC1005X40N -11.881,-72.644 r270 top
R94 "15k" RESC1005X40N -11.881,-70.644 r270 top
R95 "0" RESC2012X60N -12.781,-61.814 r180 top
R96 "7k5" RESC1005X40N -12.081,-63.584 r90 top
R97 "1k" RESC1005X40N -54.981,-8.414 r90 bottom
R98 "15k" RESC1005X40N -11.981,-65.644 r90 top
R99 "1k" RESC1005X40N -42.451,-15.814 r0 bottom
R100 "1k" RESC1005X40N -42.451,-17.014 r0 bottom
R101 "1k" RESC1005X40N -42.451,-18.314 r0 bottom
R102 "1k" RESC1005X40N -42.451,-14.514 r0 bottom
R103 "0" RESC1005X40N -87.3,51.6 r180 top
R104A "1k" RESC1005X40N 61.119,36.681 r0 bottom (schematic designator R104)
R104B "1k" RESC1005X40N 61.044,0.817 r0 bottom (schematic designator R104)
R105A "0" RESC1005X40N 32,49.1 r180 bottom (schematic designator R105)
R105B "0" RESC1005X40N 31.9,13.3 r180 bottom (schematic designator R105)
R106A "4k7" RESC1005X40N 69.119,51.336 r180 bottom (schematic designator R106)
R106B "4k7" RESC1005X40N 69.044,15.472 r180 bottom (schematic designator R106)
R107A "4k7" RESC1005X40N 64.064,55.736 r90 bottom (schematic designator R107)
R107B "4k7" RESC1005X40N 63.989,19.872 r90 bottom (schematic designator R107)
R108A "4k7" RESC1005X40N 55.174,46.436 r270 bottom (schematic designator R108)
R108B "4k7" RESC1005X40N 55.099,10.572 r270 bottom (schematic designator R108)
R109 "0" RESC1005X40N -86.6,21.5 r0 top
R110 "30k" RESC2012X60N 22.951,-20.81 r0 top
R111 "1k3" RESC2012X60N 17.709,-23.906 r90 top
R113 "330" RESC1005X40N -77.697,-7.024 r270 top
R114 "1k" RESC1005X40N -80.597,-7.024 r270 top
R115A "51" RESC2012X60N -21.887,41.888 r180 bottom (schematic designator R115)
R115B "51" RESC2012X60N -23.1,12.8 r180 bottom (schematic designator R115)
R116A "51" RESC2012X60N -21.9,39.9 r180 bottom (schematic designator R116)
R116B "51" RESC2012X60N -23.1,10.8 r180 bottom (schematic designator R116)
R117A "51" RESC2012X60N -10.1,43.2 r0 bottom (schematic designator R117)
R117B "51" RESC2012X60N -11.1,14.2 r0 bottom (schematic designator R117)
R118A "510" RESC2012X60N -13.8,44 r270 top (schematic designator R118)
R118B "510" RESC2012X60N -14.6,15 r270 top (schematic designator R118)
R119A "51" RESC2012X60N -15.2,46.5 r90 bottom (schematic designator R119)
R119B "51" RESC2012X60N -16.1,17.4 r90 bottom (schematic designator R119)
R120A "51" RESC2012X60N -16.9,46.5 r90 bottom (schematic designator R120)
R120B "51" RESC2012X60N -17.7,17.4 r90 bottom (schematic designator R120)
R121xA "4k7" RESC2012X60N -63.8,37.5 r180 bottom (schematic designator R121x)
R121xB "4k7" RESC2012X60N -63.7,7.4 r180 bottom (schematic designator R121x)
R122A "5R1" RESC1005X40N -52.23,41 r0 top (schematic designator R122)
R122B "5R1" RESC1005X40N -52.314,10.36 r0 top (schematic designator R122)
R122xA "5k1" RESC2012X60N -66.8,34.8 r90 bottom (schematic designator R122x)
R122xB "5k1" RESC2012X60N -66.8,4.9 r90 bottom (schematic designator R122x)
R123A "10" RESC2012X60N -31.5,51 r90 bottom (schematic designator R123)
R123B "10" RESC2012X60N -31.6,20.7 r90 bottom (schematic designator R123)
R124A "5R1" RESC1005X40N -52.225,40.063 r0 top (schematic designator R124)
R124B "5R1" RESC1005X40N -52.308,9.423 r0 top (schematic designator R124)
R125A "100" RESC1608X55N -44.9,34.6 r90 bottom (schematic designator R125)
R125B "100" RESC1608X55N -46.1,4.5 r90 bottom (schematic designator R125)
R126A "5R1" RESC1005X40N -52.33,52.8 r0 top (schematic designator R126)
R126B "5R1" RESC1005X40N -52.419,22.531 r0 top (schematic designator R126)
R127 "100" RESC1608X55N 72.157,-16.492 r90 top
R128A "5R1" RESC1005X40N -52.33,51.872 r0 top (schematic designator R128)
R128B "5R1" RESC1005X40N -52.419,21.603 r0 top (schematic designator R128)
R129A "4k7" RESC1005X40N 56.468,33.462 r270 top (schematic designator R129)
R129B "4k7" RESC1005X40N 56.393,-2.402 r270 top (schematic designator R129)
R130A "4k7" RESC1005X40N 28.519,58.593 r90 bottom (schematic designator R130)
R130B "4k7" RESC1005X40N 28.444,22.729 r90 bottom (schematic designator R130)
R131A "4k7" RESC1005X40N 27.019,58.593 r90 bottom (schematic designator R131)
R131B "4k7" RESC1005X40N 26.944,22.729 r90 bottom (schematic designator R131)
R144A "330" RESC1005X40N 66.043,34.948 r0 top (schematic designator R144)
R144B "330" RESC1005X40N 65.893,-2.402 r0 top (schematic designator R144)
R145A "0" RESC1005X40N 30.519,49.586 r270 bottom (schematic designator R145)
R145B "0" RESC1005X40N 30.444,13.722 r270 bottom (schematic designator R145)
R146 "100" RESC1608X55N 96.519,4.536 r180 top
R147 "330" RESC1005X40N -74.798,-7.024 r270 top
R148A "1k" RESC1005X40N 61.119,37.951 r0 bottom (schematic designator R148)
R148B "1k" RESC1005X40N 61.044,2.087 r0 bottom (schematic designator R148)
R149A "1k" RESC1005X40N 61.119,39.221 r0 bottom (schematic designator R149)
R149B "1k" RESC1005X40N 61.044,3.357 r0 bottom (schematic designator R149)
R150A "1k" RESC1005X40N 61.119,40.491 r0 bottom (schematic designator R150)
R150B "1k" RESC1005X40N 61.044,4.627 r0 bottom (schematic designator R150)
R151 "10k" RESC1608X55N -32.881,-16.914 r270 bottom
R152A "100" RESC1005X40N 58.819,36.681 r0 bottom (schematic designator R152)
R152B "100" RESC1005X40N 58.744,0.817 r0 bottom (schematic designator R152)
R153A "100" RESC1005X40N 58.819,37.951 r0 bottom (schematic designator R153)
R153B "100" RESC1005X40N 58.744,2.087 r0 bottom (schematic designator R153)
R154A "100" RESC1005X40N 58.819,39.221 r0 bottom (schematic designator R154)
R154B "100" RESC1005X40N 58.744,3.357 r0 bottom (schematic designator R154)
R155A "100" RESC1005X40N 58.819,40.491 r0 bottom (schematic designator R155)
R155B "100" RESC1005X40N 58.744,4.627 r0 bottom (schematic designator R155)
R156A "4k7" RESC1005X40N 69.089,55.391 r180 bottom (schematic designator R156)
R156B "4k7" RESC1005X40N 69.014,19.528 r180 bottom (schematic designator R156)
R157A "4k7" RESC1005X40N 69.119,45.336 r180 bottom (schematic designator R157)
R157B "4k7" RESC1005X40N 69.044,9.472 r180 bottom (schematic designator R157)
R158A "4k7" RESC1005X40N 69.119,47.336 r180 bottom (schematic designator R158)
R158B "4k7" RESC1005X40N 69.044,11.472 r180 bottom (schematic designator R158)
R159A "4k7" RESC1005X40N 69.089,49.336 r180 bottom (schematic designator R159)
R159B "4k7" RESC1005X40N 69.014,13.472 r180 bottom (schematic designator R159)
R160 "100" RESC1608X55N 96.519,2.336 r180 top
R161 "100" RESC1608X55N 96.519,-0.081 r180 top
R162 "100" RESC1608X55N 96.519,-2.347 r180 top
R163 "20" RESC2012X60N 94.416,-8.389 r270 top
R164A "2k4" RESC1005X40N 56.444,55.736 r90 bottom (schematic designator R164)
R164B "2k4" RESC1005X40N 56.369,19.872 r90 bottom (schematic designator R164)
R165A "33" RESC1005X40N 62.794,46.436 r270 bottom (schematic designator R165)
R165B "33" RESC1005X40N 62.719,10.572 r270 bottom (schematic designator R165)
R166A "33" RESC1005X40N 55.174,55.736 r90 bottom (schematic designator R166)
R166B "33" RESC1005X40N 55.099,19.872 r90 bottom (schematic designator R166)
R167A "33" RESC1005X40N 55.174,48.781 r270 bottom (schematic designator R167)
R167B "33" RESC1005X40N 55.099,12.918 r270 bottom (schematic designator R167)
R168A "33" RESC1005X40N 64.119,53.143 r90 bottom (schematic designator R168)
R168B "33" RESC1005X40N 64.044,17.279 r90 bottom (schematic designator R168)
R169A "2k4" RESC1005X40N 61.524,55.736 r270 bottom (schematic designator R169)
R169B "2k4" RESC1005X40N 61.449,19.872 r270 bottom (schematic designator R169)
R232A "33" RESC1608X55N -70.55,7.025 r270 top (schematic designator R232)
R232B "33" RESC1608X55N -70.4,22.129 r270 top (schematic designator R232)
R232C "33" RESC1608X55N -70.4,37.629 r270 top (schematic designator R232)
R232D "33" RESC1608X55N -70.568,52.096 r270 top (schematic designator R232)
R233A "Undefined" RESC1005X40N -78.77,11.3 r0 bottom (schematic designator R233)
R233B "Undefined" RESC1005X40N -78.7,25.7 r0 bottom (schematic designator R233)
R233C "Undefined" RESC1005X40N -78.7,41.2 r0 bottom (schematic designator R233)
R233D "Undefined" RESC1005X40N -78.868,55.668 r0 bottom (schematic designator R233)
R234A "210" RESC1608X55N -78.8,12.4 r0 bottom (schematic designator R234)
R234B "210" RESC1608X55N -78.7,27 r0 bottom (schematic designator R234)
R234C "210" RESC1608X55N -78.7,42.5 r0 bottom (schematic designator R234)
R234D "210" RESC1608X55N -78.868,56.968 r0 bottom (schematic designator R234)